# Altium PCB DoorNode.PcbDoc
Units mm, origin at the board's own origin, x right, y up, seen from the top; angles counter-clockwise.
Board outline 25 x 25 mm, 2 copper layers (Top Layer, Bottom Layer); 12 components, 11 nets, 43 pads, 8 vias.
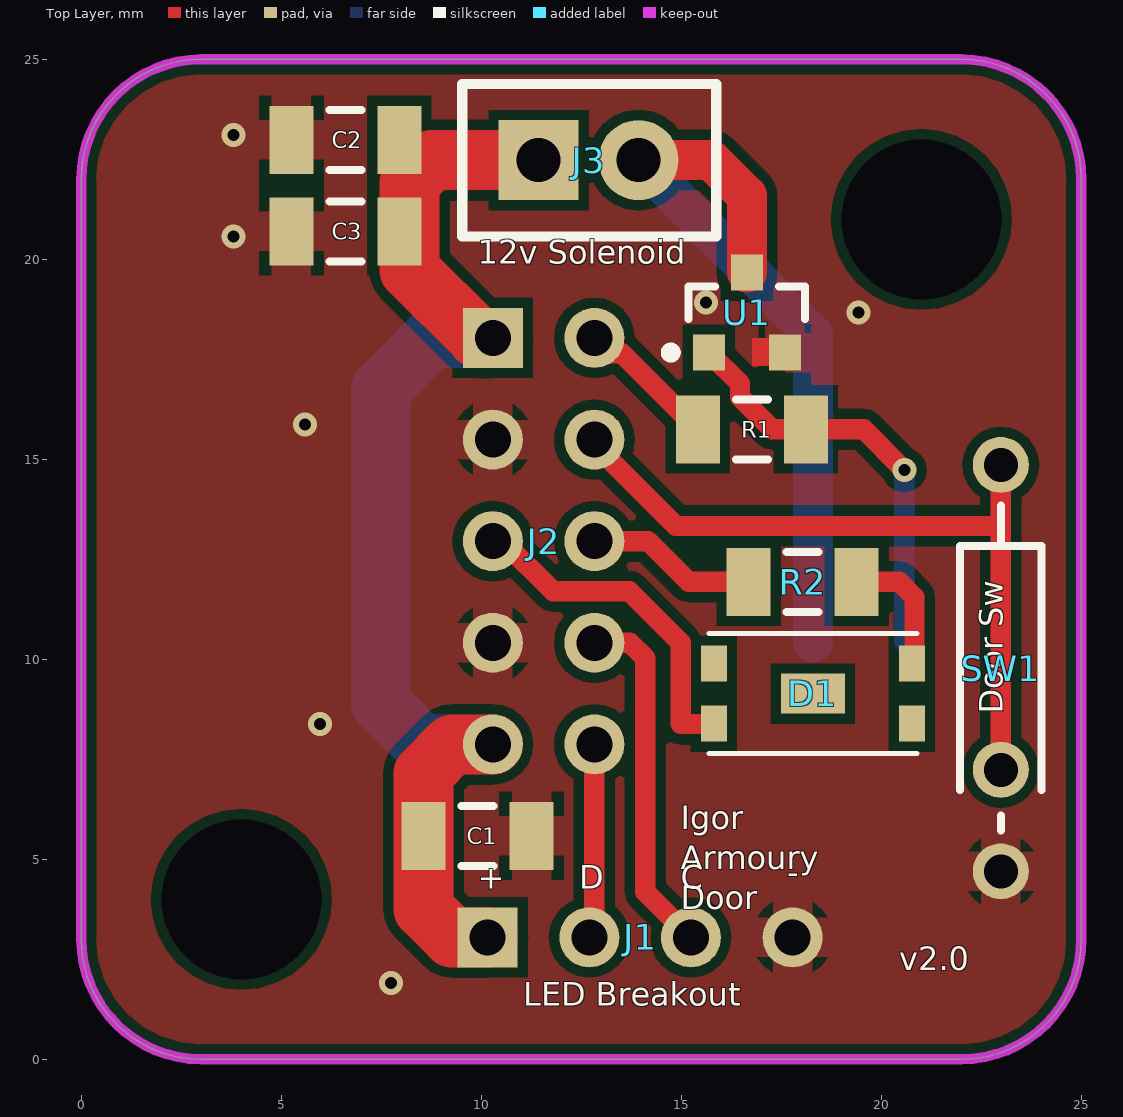
[diagram p0: Top Layer view]
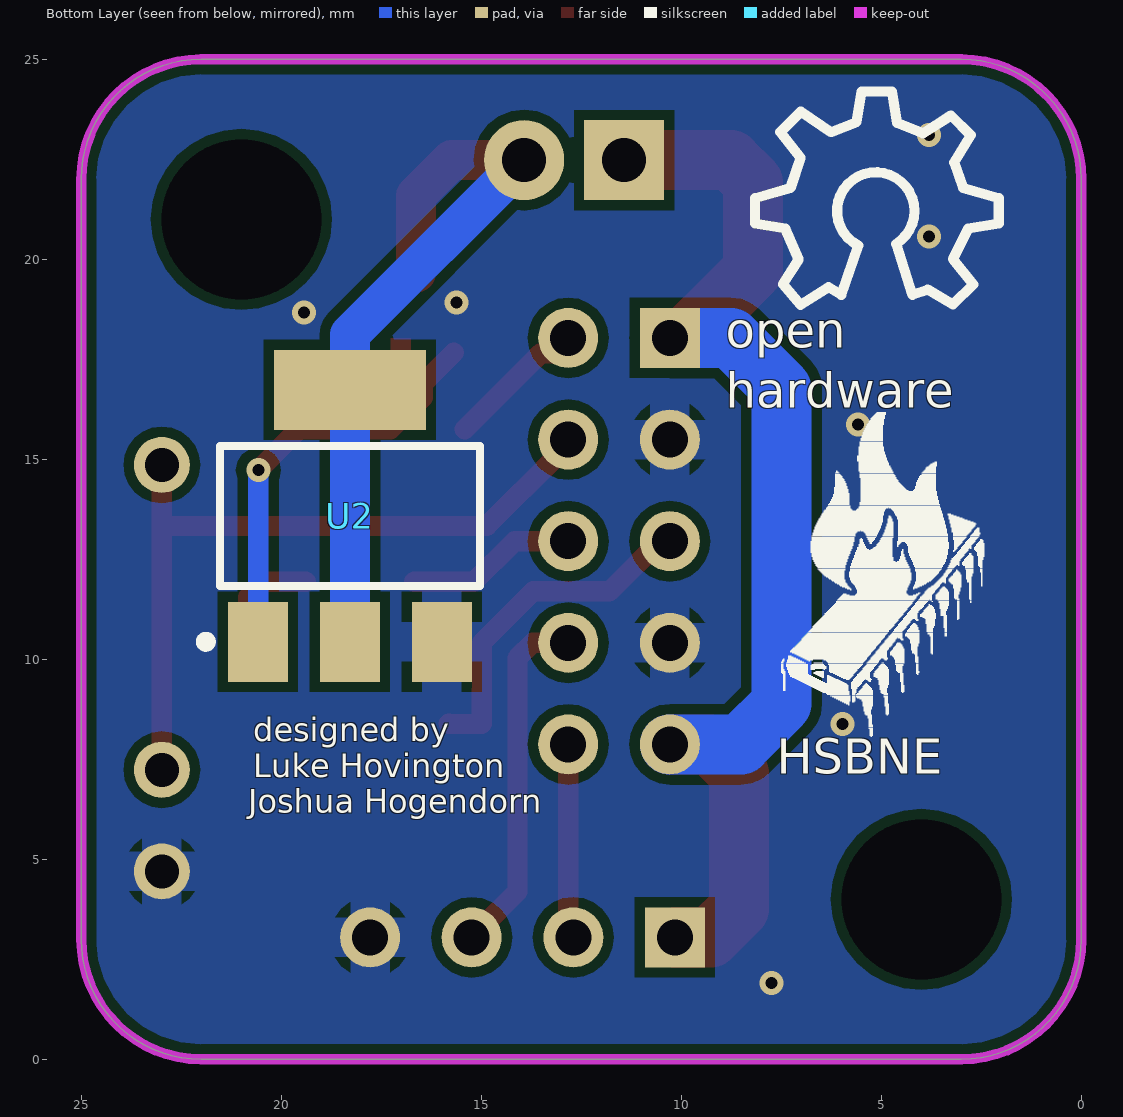
[diagram p1: Bottom Layer view, seen from below]

## Layer stack, top to bottom
Top Solder: solder mask 0.0102, Solder Resist, Dk 3.5
Top Layer: signal copper 0.0356
Dielectric1: dielectric 0.32, FR-4, Dk 4.8
Bottom Layer: signal copper 0.0356
Bottom Solder: solder mask 0.0102, Solder Resist, Dk 3.5

## Board outline
3,0 cw(c3,3) 0,3 0,22 cw(c3,22) 3,25 22,25 cw(c22,22) 25,22 25,3 cw(c22,3) 22,0

## Design rules (kind name [scope] priority, off if disabled: settings)
Clearance [All] p1: gap=0.25
HoleSize [All] p1: absolutevalues=TRUE maxlimit=4 minlimit=0.3 maxpercent=80.000 minpercent=20.000
MatchedLengths [InDifferentialPair('RS485')] p1: tolerance=2 checknetsindiffpair=FALSE checkdiffpairvsdiffpair=TRUE checkxsignals=TRUE checkothers=TRUE
MinimumSolderMaskSliver [(InComponent('U1') OR InComponent('U4') OR InComponent('Y1'))] p1: minsoldermaskwidth=0.045
MinimumSolderMaskSliver MinimumSolderMaskSliver_1 [All] p2: minsoldermaskwidth=0.25
PolygonConnect PolygonConnect_1 [isvia] p1: connectstyle=Direct reliefconductorwidth=0.254 reliefentries=4 polygonreliefangle="90 Angle" airgapwidth=0.254
PolygonConnect [All] p2: connectstyle=Relief reliefconductorwidth=1 reliefentries=4 polygonreliefangle="90 Angle" airgapwidth=0.254
RoutingVias [All] p1: holewidth=0.3 width=0.5 viastyle="Through Hole" minholewidth=0.2 minwidth=0.5 maxholewidth=0.711 maxwidth=1.27
SilkToSolderMaskClearance [IsPad] p1 off: minsilkscreentomaskgap=0.254 clearancetoexposedcopper=TRUE
SolderMaskExpansion [All] p1: expansion=0.102
Width [All] p1: maxlimit=1.5 minlimit=0.254 preferedwidth=0.508 minimp=50.000000 maximp=50.000000 favimp=50.000000
27 further rules are at their usual default settings.

## Components (designator, comment, footprint, x,y, rotation, side; value= is the part's Value field where it differs from the comment)
C1 "100nF" C1206 9.906,5.588 r180 top
C2 "100nF" C1206 6.604,22.987 r0 top
C3 "1uF" C1206 6.604,20.701 r0 top
D1 "LED-White" STW8Q14 18.288,9.144 r180 top
J1 "Header 4x1" 4X1 10.16,3.048 r90 top
J2 "Header 2x4" 2x5 10.287,18.034 r0 top
J3 "Solenoid" JST-XH 11.43,22.479 r0 top
R1 "0R" C1206 16.764,15.748 r0 top
R2 "0R" C1206 18.034,11.938 r180 top
SW1 "Switch" ReedSwitch 22.987,9.779 r90 top
U1 "Inductive Load Driver" SOT-23 16.637,18.669 r90 top
U2 "NCV8402ASTT1G" ONSC-SOT-223-4-318E-04_V 18.288,13.589 r90 bottom

## Footprints (in the part's own frame and the unit in brackets; to place one, negate y for a bottom-side part, rotate by r counter-clockwise, add the part's x,y. Pads: shape width x height; smd on the part's side, far side on the other; paste and mask are expansions set on the pad)
2x5 [mm]
  rect 1.5x1.5 hole 0.9: 1(0,0)
  round 1.5 hole 0.9: 2(0,-2.54) 3(0,-5.08) 4(0,-7.62) 5(0,-10.16) 6(2.54,0) 7(2.54,-2.54) 8(2.54,-5.08) 9(2.54,-7.62) 10(2.54,-10.16)
  body extent -9.74,-8.51 2.89,1.25, height 5.79
4X1 [mm]
  rect 1.5x1.5 hole 0.9: 1(0,0)
  round 1.5 hole 0.9: 2(0,-2.54) 3(0,-5.08) 4(0,-7.62)
C1206 [mm] "Chip Capacitor, Body 3.2x1.6mm, IPC High Density"
  rect 1.1x1.7 smd: 1(-1.35,0) 2(1.35,0)
  silkscreen extent -0.4,-0.75 0.4,0.75, body extent -1.7,-0.9 1.7,0.9, height 1.3
JST-XH [mm] "JST-XH"
  rect 2x2 hole 1.1: 1(0,0)
  round 2 hole 1.1: 2(2.5,0)
  silkscreen extent -1.91,-1.91 4.44,1.91
ONSC-SOT-223-4-318E-04_V [mm] "SOT223, 4-Leads, Body 6.5x3.5mm, Pitch 2.3mm"
  rect 2x1.5 smd: 1(-3.15,2.3) 2(-3.15,0) 3(-3.15,-2.3)
  rect 2x3.8 smd: 4(3.15,0)
  silkscreen extent -3.27,-3.25 1.75,3.73, body extent -1.75,-3.25 1.75,3.25, height 1.75
ReedSwitch [mm] "Axial Device, Thru-Hole; 2 Leads; 0.4 in Pin Spacing"
  round 1.4 hole 0.85: 1(-5.08,0) 2(-2.54,0) 2(5.08,0)
  silkscreen extent -4.06,-1.02 4.06,1.02
SOT-23 [mm] "SOT23, 3-Leads, Body 2.92x1.3mm, Pitch 0.95mm"
  rect 0.9x0.8 smd: 1(-1,0.95) 2(-1,-0.95) 3(1,0)
  silkscreen extent -1.12,-1.46 0.65,2.02, body extent -0.65,-1.46 0.65,1.46, height 1.11
STW8Q14 [mm] "LED SMD NEUTRAL WHITE"
  rect 0.65x0.9 smd: 0(-2.475,0.75) 0(2.475,-0.75) 1(-2.475,-0.75) 2(2.475,0.75)
  rect 1.6x1 smd: 3(0,0)
  silkscreen extent -2.6,-1.5 2.6,1.5

## Part data
C1 C2: library part "Cap 100nF", "Capacitor (Semiconductor SIM Model)"
C3: library part "Cap 1uF", "Capacitor (Semiconductor SIM Model)"
D1: "White"
J2: library part "Header 2x4a", "Header"
J3: library part "Header 2 JST-XH", "Header, 2-Pin"
R1 R2: library part Resistor-10K, "Resistor"
SW1: "ReedSwitch"
U1: library part NUD3112, "Integrated Relay,  Inductive Load Driver"
U2: library part CMP-1069-00019-1, "Self-Protected Low Side Driver with Temperature and Current Limit, 4-Pin SOT-223, Pb-Free, Tape and Reel"

## Free pads (board coordinates)
  round 1.524 hole 4 unplated: ""(4,4) ""(21,21)

## Via types
v1: diameter 0.6, hole 0.3, Top Layer to Bottom Layer, tented both sides, 8 vias

## Nets (pads, with @x,y where several pads share a name; then routed paths per layer and width w, separated by ;. In a path a pad name is that pad's centre, name@x,y a point inside that pad or via, vN(x,y) a via of type N, cw(c..) or ccw(c..) an arc to the next point about the centre after c; other vN are vias at no path point)
12V: C1.2 C2.2 C3.2 J1.1 J2.1 J2.5 J3.1 | length 30.2
  Top Layer w1.5: J1.1 9.271,3.048 8.556,3.763 C1.2 8.556,7.152 9.278,7.874 J2.5 ; J2.1 9.906,18.034 8.208,19.732 8.208,21.924 8.763,22.479 J3.1
  Bottom Layer w1.5: J2.5 8.509,7.874 7.493,8.89 7.493,16.764 8.763,18.034 J2.1
ACT_A: D1.2 J2.3 | length 8.6
  Top Layer w0.508: J2.3 10.541,12.954 11.795,11.7 13.7,11.7 14.984,10.416 14.984,9.233 14.986,9.231 14.986,8.382 15.801,8.382 D1.2
ACT_K: J2.8 R2.2 | length 4.3
  Top Layer w0.508: J2.8 14.168,12.954 15.184,11.938 R2.2
DOOR: J3.2 U1.3 U2.2 U2.4 | length 18.8
  Top Layer w1: J3.2 15.748,22.479 16.637,21.59 U1.3
  Bottom Layer w1: J3.2 18.288,18.121 U2.4 U2.2
DR: J2.6 R1.1 | length 3.4
  Top Layer w0.508: J2.6@12.827,17.653 13.509,17.653 R1.1
GND: C1.1 C2.1 C3.1 J1.4 J2.2 J2.4 SW1.1 U1.2 U2.3
  other v1: 7.747,1.905 5.969,8.382 5.588,15.875 19.431,18.669 15.621,18.923 3.81,20.574 3.81,23.114
GT: R1.2 U1.1 U2.1 | length 10.6
  Top Layer w0.508: U1.1 16.468,16.888 16.468,16.552 17.272,15.748 R1.2 19.558,15.748 v1(20.574,14.732)
  Bottom Layer w0.508: v1(20.574,14.732) 20.574,10.453 U2.1
LD: J1.2 J2.10 | length 4.5
  Top Layer w0.508: J1.2 12.827,3.175 J2.10@12.827,7.493
LK: J1.3 J2.9 | length 8.9
  Top Layer w0.508: J2.9 13.716,10.414 14.097,10.033 14.097,4.191 J1.3
NetD1_1: D1.1 R2.1 | length 3.3
  Top Layer w0.508: R2.1 20.447,11.938 20.828,11.557 20.828,9.959 D1.1
SN: J2.7 SW1.2 | length 18.5
  Top Layer w0.508: J2.7@12.827,15.113 13.081,15.113 14.859,13.335 22.987,13.335 ; SW1.2@22.987,7.239 22.987,13.335 ; SW1.2@22.987,14.859 22.987,13.335
pads on no net: D1.0 D1.3

## Polygon pours and split planes (outlines as drawn)
GND on Top Layer "Top Layer-No Net" (solid, remove dead copper, pour order 2): 0,0 25,0 25,25 0,25
GND on Bottom Layer "Top Layer-No Net" (solid, remove dead copper, pour order 3): 0,0 25,0 25,25 0,25

## Keep-outs
Keep-Out Layer:
  the board outline again, w0.254

## Other copper
Top Layer:
  rectangle net GND: 16.764,17.336 17.272,18.034

## Silkscreen, mask and mechanical layers (free items; w line width, h text height)
Top Overlay:
  text "12v Solenoid" at 9.906,19.685 h1
  text "Door Sw" at 23.241,8.636 h1 r90
  text "-" at 17.653,4.191 h1
  text "+" at 9.906,4.064 h1
  text "D" at 12.446,4.064 h1
  text "C" at 14.986,4.064 h1
  text "Igor / Armoury / Door" at 14.986,3.556 h1
  text "v2.0" at 20.447,2.032 h1
  text "LED Breakout" at 11.049,1.143 h1
Bottom Overlay:
  drawing of 1356 lines, arcs and shapes, not listed
  text "open / hardware" at 8.89,16.002 h1.5
  text "designed by" at 20.701,7.747 h1
  text "HSBNE" at 7.62,6.858 h1.5
  text "Luke Hovington" at 20.701,6.858 h1
  text "Joshua Hogendorn" at 20.828,5.969 h1